# Altium PCB MachPCB.PcbDoc
Units mm, origin at the board's own origin, x right, y up, seen from the top; angles counter-clockwise.
Board outline 94.23 x 98.55 mm, 2 copper layers (Top Layer, Bottom Layer); 37 components, 27 nets, 126 pads, 2 vias.
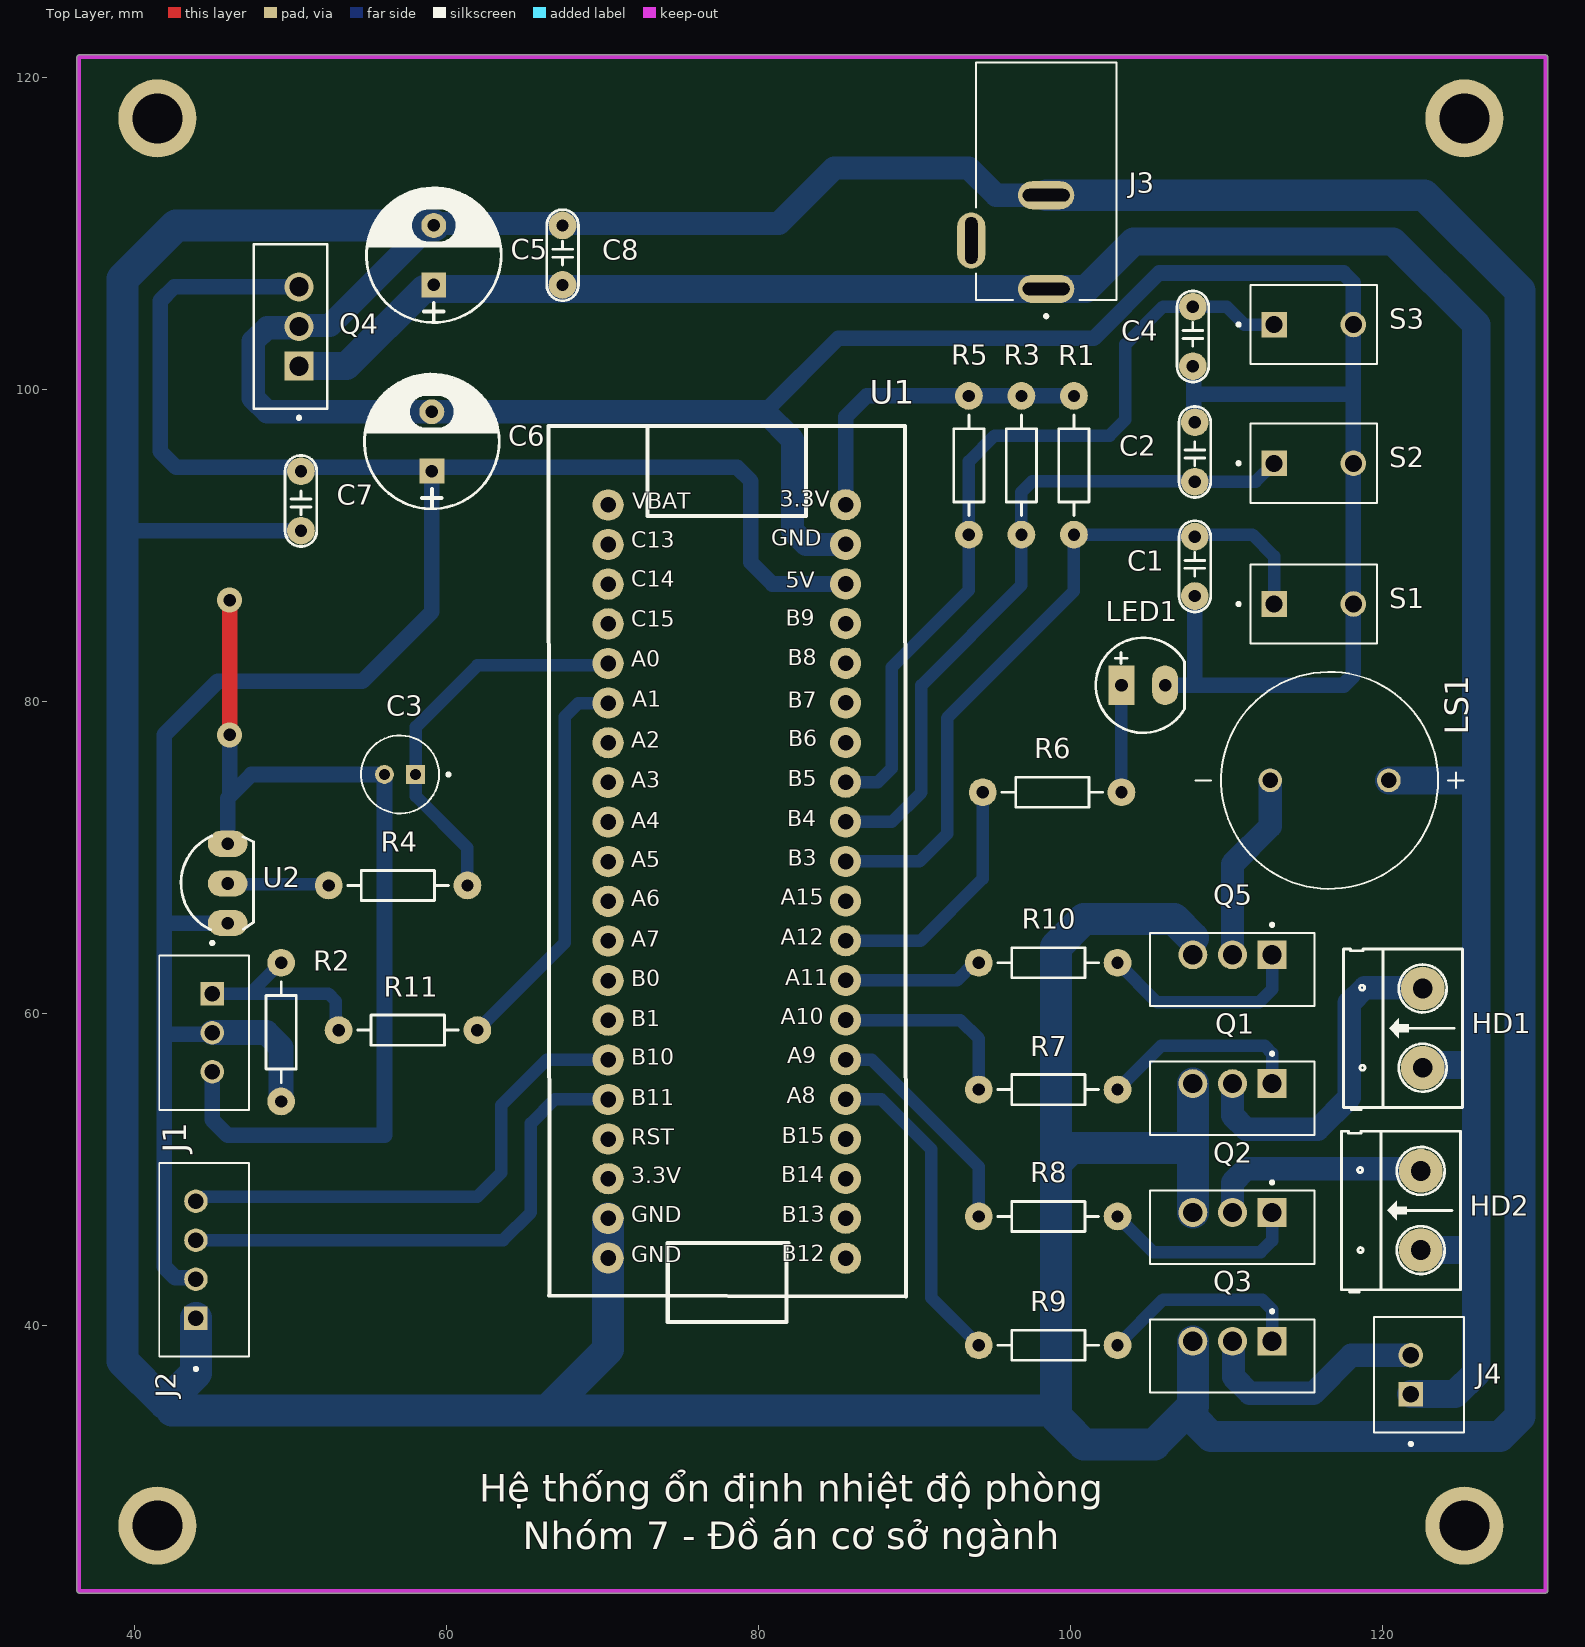
[diagram p0: Top Layer view]
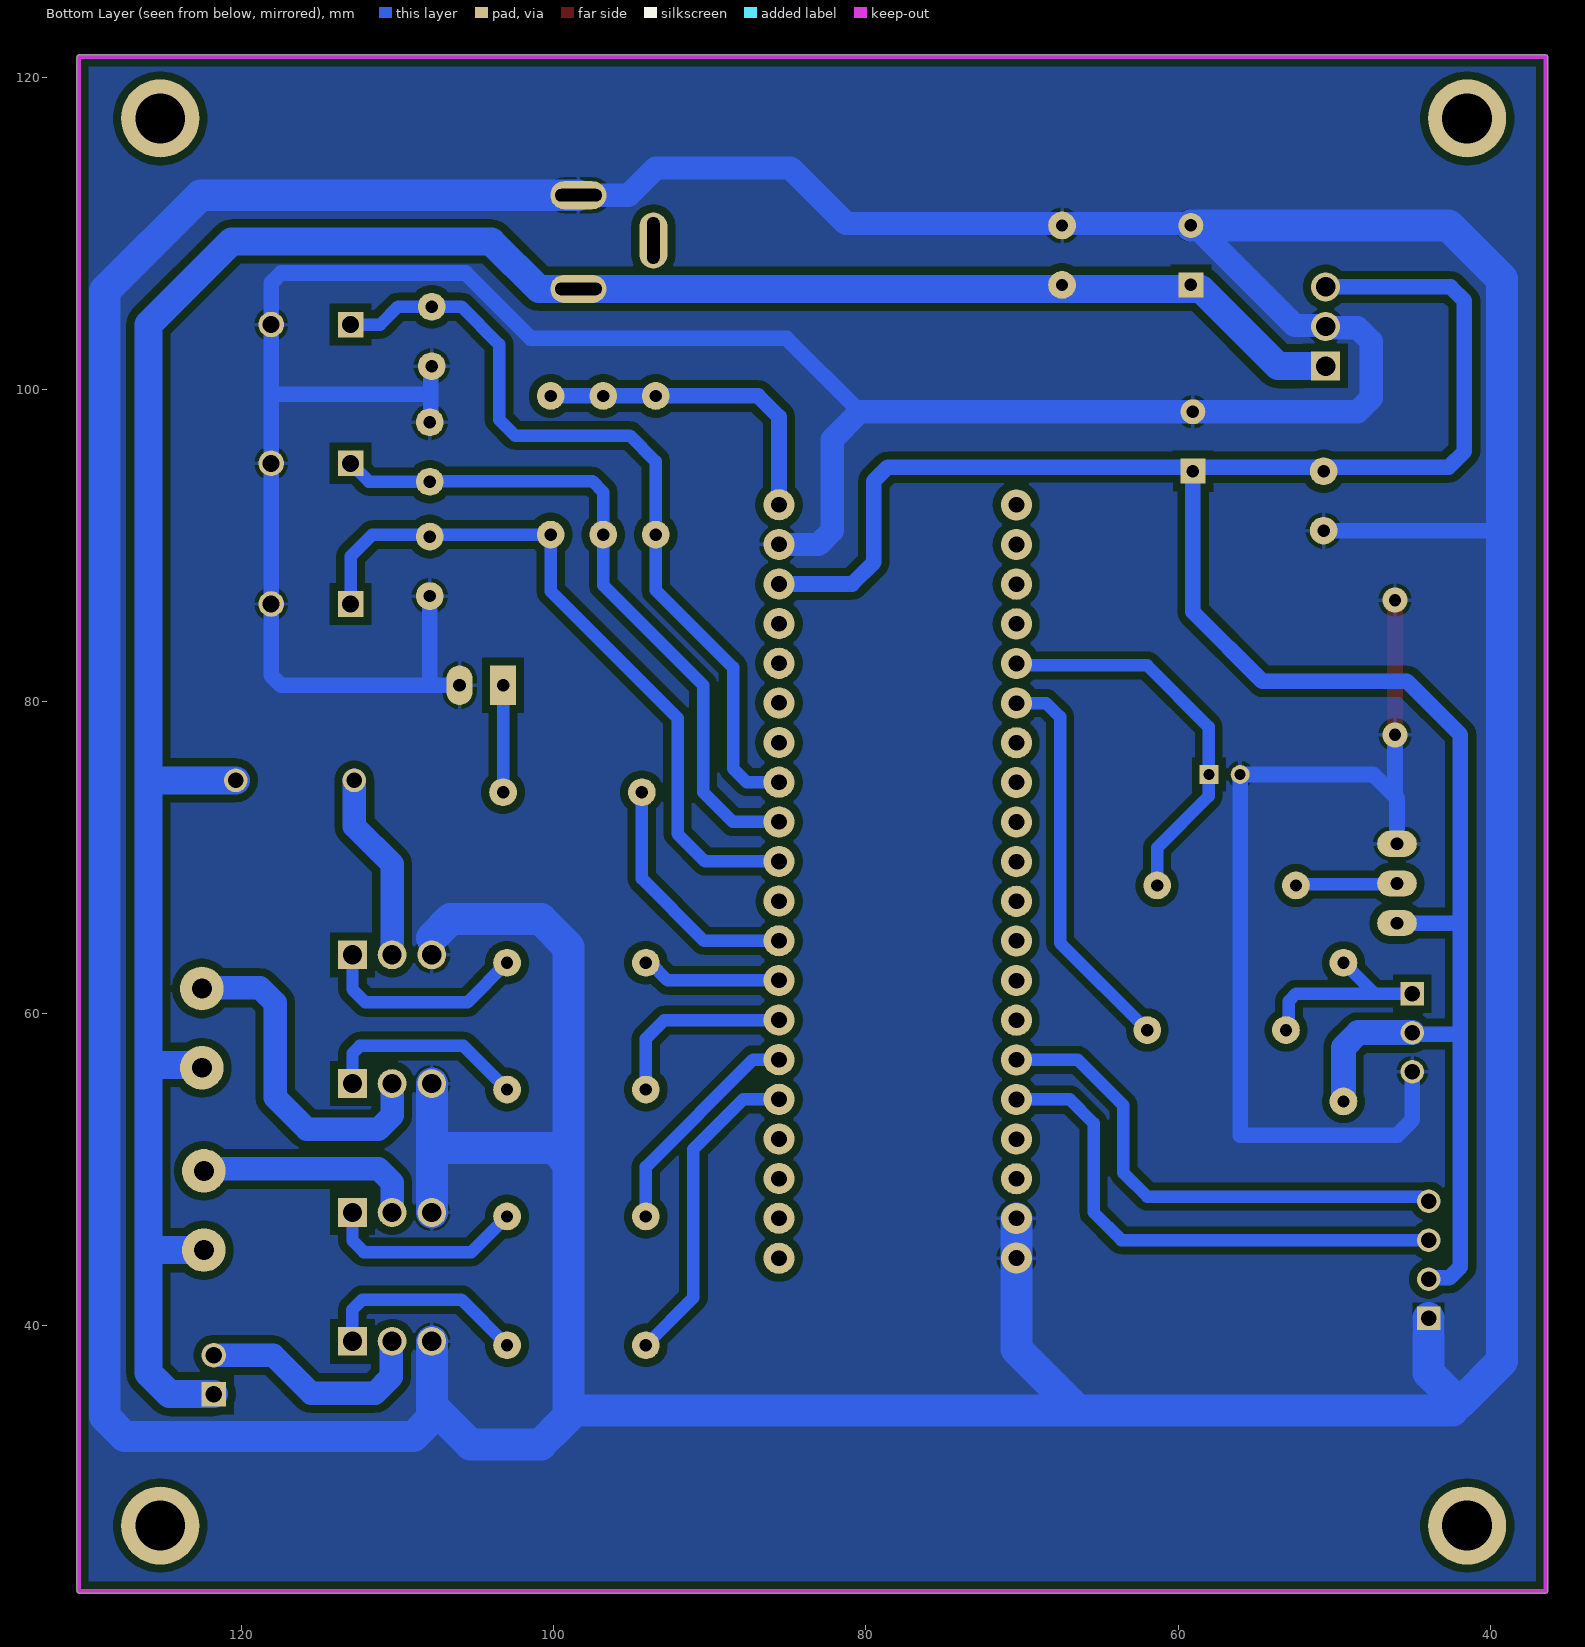
[diagram p1: Bottom Layer view, seen from below]
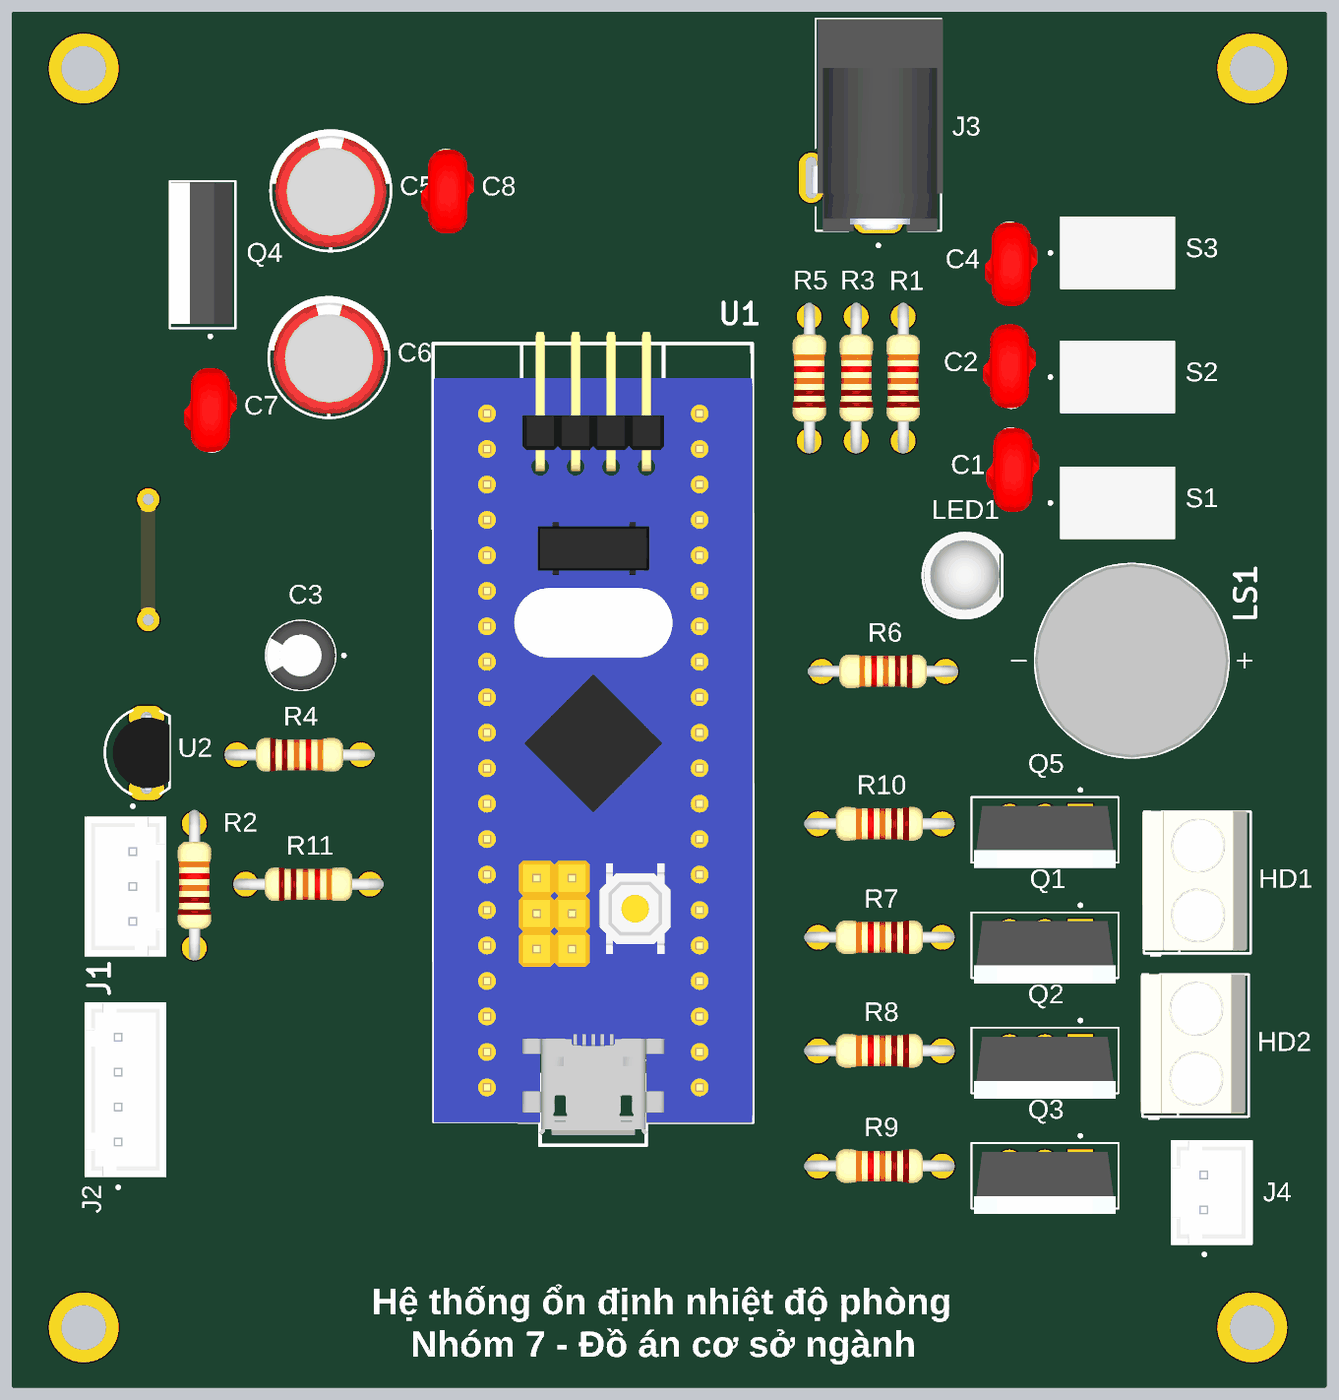
[diagram p2: 3D render of the assembled board from above, using the file's embedded part models]

## Layer stack, top to bottom
Top Solder: solder mask 0.0102, Solder Resist, Dk 3.5
Top Layer: signal copper 0.0356
Dielectric 1: dielectric 0.32, FR-4, Dk 4.8
Bottom Layer: signal copper 0.0356
Bottom Solder: solder mask 0.0102, Solder Resist, Dk 3.5

## Board outline
36.322,22.987 36.322,121.285 cw(c36.449,121.285) 36.449,121.412 130.429,121.412 cw(c130.429,121.285) 130.556,121.285 130.556,22.987 cw(c130.429,22.987) 130.429,22.86 36.449,22.86 cw(c36.449,22.987)

## Design rules (kind name [scope] priority, off if disabled: settings)
Clearance Polygon [InPolygon] p1: gap=0.5 ignorepadtopadclearanceinfootprint=FALSE
Clearance [All] p2: gap=0.37 ignorepadtopadclearanceinfootprint=FALSE
PolygonConnect [All] p1: connectstyle=Relief reliefconductorwidth=0.254 reliefentries=4 polygonreliefangle="90 Angle" airgapwidth=0.254
RoutingVias [All] p1: holewidth=0.711 width=1.27 viastyle="Through Hole" minholewidth=0.711 minwidth=1.27 maxholewidth=0.711 maxwidth=1.27
SolderMaskExpansion [All] p1: expansion=0.102 istentingtop=FALSE
Width POWER [(InNet('12V') OR InNet('NetHD1_2') OR InNet('NetHD2_2') OR InNet('NetLS1_N') OR InNet('NetJ4_2') OR InNet('GND') OR InNet('5V')OR InNet('3.3V'))] p1: maxlimit=3 minlimit=1 preferedwidth=1.8
Width NET [All] p2: maxlimit=0.8 minlimit=0.8 preferedwidth=0.8
30 further rules are at their usual default settings.

## Components (designator, comment, footprint, x,y, rotation, side; value= is the part's Value field where it differs from the comment)
C1 "104" CN1.5 107.95,90.551 r270 top value=100pF
C2 "104" CN1.5 107.95,94.069 r90 top value=100pF
C3 "0.1uF" CAPPRD200W50D550H1250 57.023,75.311 r180 top
C4 "104" CN1.5 107.823,105.283 r270 top value=100pF
C5 "200uF" CP1.5/3.4 59.182,106.68 r90 top
C6 "200uF" CP1.5/3.4 59.055,94.742 r90 top
C7 "104" CN1.5 50.673,90.932 r90 top value=100pF
C8 "104" CN1.5 67.437,110.49 r270 top value=100pF
HD1 "Header 2" HED2 122.555,56.515 r90 top
HD2 "Header 2" HED2 122.428,44.831 r90 top
J1 "Header XH2.54 3P" JST_B3B-XH-A 44.467,58.761 r90 top
J2 "Header XH2.54 4P" JST_B4B-XH-A 44.467,44.216 r270 top
J3 "DJ_2.5x5.7mm" CUI_PJ-059B 98.425,106.426 r270 top
J4 "Header XH2.54 2P" JST_B2B-XH-A 122.318,36.85 r270 top
LED1 "LED" LED-5R 104.648,81.026 r0 top value="LED 3 ly Single Colour"
LS1 "Buzzer" Buzzer-5V 116.586,74.93 r180 top
Q1 "IRLZ44N" TO254P1054X469X1930-3 110.363,54.559 r180 top
Q2 "IRLZ44N" TO254P1054X469X1930-3 110.363,46.304 r180 top
Q3 "IRLZ44N" TO254P1054X469X1930-3 110.363,38.049 r180 top
Q4 "LM7805T" TO254P1054X470X2600-3 50.546,101.473 r90 top
Q5 "IRLZ44N" TO254P1054X469X1930-3 110.363,62.814 r180 top
R1 "10k" R1/4W 100.203,99.568 r270 top value="R1/4W - 1K"
R2 "1k" R1/4W 49.403,63.246 r270 top value="R1/4W - 1K"
R3 "10k" R1/4W 96.837,99.568 r270 top value="R1/4W - 1K"
R4 "1k" R1/4W 61.341,68.199 r180 top value="R1/4W - 1K"
R5 "10k" R1/4W 93.472,99.568 r270 top value="R1/4W - 1K"
R6 "1k" R1/4W 94.361,74.168 r0 top value="R1/4W - 1K"
R7 "220" R1/4W 94.107,55.118 r0 top value="R1/4W - 1K"
R8 "220" R1/4W 94.107,46.99 r0 top value="R1/4W - 1K"
R9 "220" R1/4W 94.107,38.735 r0 top value="R1/4W - 1K"
R10 "220" R1/4W 94.107,63.246 r0 top value="R1/4W - 1K"
R11 "0" R1/4W 61.976,58.928 r180 top value="R1/4W - 1K"
S1 "PushButton" SW_800AWSP9M2QE 115.57,86.233 r0 top
S2 "PushButton" SW_800AWSP9M2QE 115.57,95.25 r0 top
S3 "PushButton" SW_800AWSP9M2QE 115.57,104.14 r0 top
U1 "STM32F103C8T6" "Stm32 BluePill" 77.744,74.217 r0 top
U2 "LM35" QTO-92 45.974,68.326 r90 top

## Footprints (in the part's own frame and the unit in brackets; to place one, negate y for a bottom-side part, rotate by r counter-clockwise, add the part's x,y. Pads: shape width x height; smd on the part's side, far side on the other; paste and mask are expansions set on the pad)
Buzzer-5V [mm]
  round 1.508 hole 1: N(3.8,0) P(-3.8,0)
  silkscreen extent -8.59,-6.95 8.59,6.95, body extent -6.95,-6.94 6.95,6.94, height 7.5
CAPPRD200W50D550H1250 [mm]
  rect 1.208x1.208 / inner round 1.208 / far side rect 1.208x1.208 hole 0.7: 1(-1,0)
  round 1.208 hole 0.7: 2(1,0)
  silkscreen extent -3.2,-2.5 2.5,2.5, body extent -2.5,-2.5 2.5,2.5, height 12.5
CN1.5 [mil]
  round 70 hole 31: 1(0,0) 2(150,0)
  silkscreen extent -40,-40 190,40, body extent -41,-70 195,80, height 989
CP1.5/3.4 [mm] "Tu hoa 220->470uF,16V, 470uF/16V,25V"
  rect 1.6x1.6 hole 0.8: 1(0,0)
  round 1.6 hole 0.8: 2(3.81,0)
  silkscreen extent -2.41,-4.32 6.22,4.32, body extent -2.16,-4 5.84,4, height 11.33
CUI_PJ-059B [mm]
  oval 1.8x3.6 hole 0.8 slot 3 at 90 deg: 1(0,0) 2(-6,0)
  oval 3.6x1.8 hole 0.8 slot 3 at 0 deg: 3(-3.1,-4.8)
  silkscreen extent -14.5,-4.5 1.85,4.5, body extent -14.46,-4.77 0.74,4.63, height 11
HED2 [mil] "Header 2, 2 pin, hight 300mil, Pin to Pin 200, Colour Green"
  round 110 hole 50: 1(0,0) 2(200,0)
  silkscreen extent -106,-100 300,200, body extent -92,-90 302,205, height 394
JST_B2B-XH-A [mm]
  rect 1.575x1.575 / inner round 1.575 / far side rect 1.575x1.575 hole 1.05: 1(1.25,-0.525)
  round 1.575 hole 1.05: 2(-1.25,-0.525)
  silkscreen extent -3.7,-2.88 4.54,2.88, body extent -3.7,-2.92 3.7,2.83, height 7
JST_B3B-XH-A [mm]
  rect 1.508x1.508 / inner round 1.508 / far side rect 1.508x1.508 hole 1: 1(2.5,-0.525)
  round 1.508 hole 1: 2(0,-0.525) 3(-2.5,-0.525)
  silkscreen extent -4.95,-2.88 5.85,2.88, body extent -4.95,-2.88 4.95,2.88, height 7
JST_B4B-XH-A [mm]
  rect 1.508x1.508 / inner round 1.508 / far side rect 1.508x1.508 hole 1: 1(3.75,-0.525)
  round 1.508 hole 1: 2(1.25,-0.525) 3(-1.25,-0.525) 4(-3.75,-0.525)
  silkscreen extent -6.2,-2.88 7.1,2.88, body extent -6.2,-2.88 6.2,2.88, height 7
LED-5R [mil] "LED 2 PIN, 5 ly , Only Red colour, pin to pin 110mil"
  rect 65x100 hole 32: 1(-55,0)
  oval 65x100 hole 32: 2(55,0)
  silkscreen extent -120,-120 104,120, body extent -116,-117 98,120, height 485
QTO-92 [mil] "TO-92"
  oval 66x100 hole 32: 1(-100,0) 2(0,0) 3(100,0)
  silkscreen extent -117,-65 120,118, body extent -109,-66 109,95, height 385
R1/4W [mil] "R 1/4W, 2 Pin, 350mil"
  round 70 hole 31: 1(0,0) 2(350,0)
  silkscreen extent 48,-38 302,38, body extent -40,-47 386,47, height 111
"Stm32 BluePill" [mm]
  round 2 hole 1: 1(7.828,-29.909) 2(7.828,-27.343) 3(7.828,-24.803) 4(7.828,-22.263) 5(7.828,-19.723) 6(7.828,-17.183) 7(7.828,-14.643) 8(7.828,-12.103) 9(7.828,-9.563) 10(7.828,-7.023) 11(7.828,-4.483) 12(7.828,-1.943) 13(7.828,0.597) 14(7.828,3.137) 15(7.828,5.677) 16(7.828,8.217) 17(7.828,10.757) 18(7.828,13.297) 19(7.828,15.837) 20(7.828,18.377) 21(-7.386,18.366) 22(-7.386,15.826) 23(-7.386,13.286) 24(-7.386,10.746) 25(-7.386,8.206) 26(-7.386,5.666) 27(-7.386,3.126) 28(-7.386,0.586) 29(-7.386,-1.954) 30(-7.386,-4.494) 31(-7.386,-7.034) 32(-7.386,-9.574) 33(-7.386,-12.114) 34(-7.386,-14.654) 35(-7.386,-17.194) 36(-7.386,-19.734) 37(-7.386,-22.274) 38(-7.386,-24.814) 39(-7.386,-27.354) 40(-7.386,-29.894)
  silkscreen extent -11.22,-34 11.69,23.43, body extent -11.18,-33.27 11.68,24.29, height 12.31
SW_800AWSP9M2QE [mm]
  rect 1.635x1.635 / inner round 1.635 / far side rect 1.635x1.635 hole 1.09 mask+0.102: 1(-2.54,0)
  round 1.635 hole 1.09 mask+0.102: 3(2.54,0)
  silkscreen extent -4.91,-2.54 4.07,2.54, body extent -4.07,-2.54 4.07,2.54, height 18.85
TO254P1054X469X1930-3 [mm]
  rect 1.85x1.85 / inner round 1.85 / far side rect 1.85x1.85 hole 1.23: 1(-2.54,-0.94)
  round 1.85 hole 1.23: 2(0,-0.94) 3(2.54,-0.94)
  silkscreen extent -5.27,-2.96 5.27,2.35, body extent -5.08,-1.71 5.08,2.73, height 15.01
TO254P1054X470X2600-3 [mm]
  rect 1.86x1.86 / inner round 1.86 / far side rect 1.86x1.86 hole 1.24: 1(0,0)
  round 1.86 hole 1.24: 2(2.54,0) 3(5.08,0)
  silkscreen extent -3.41,-1.8 7.81,2.9, body extent -2.41,-1.57 7.69,2.83, height 19.05

## Part data
C1 C2 C4 C7 C8: library part CN1, "Cap np  1pF - 472pF"
C3 C5 C6: library part "Tu Hoa 4.7uF", "Capacitor, Aluminum Electrolytic, Cap 4.7uF 25V 20%, Radial 5X11 LS 5 mm", Package="RADIAL-2 NICHICON", Check_prices=https://www.snapeda.com/parts/UVR1E4R7MDD/Nichicon/view-part/?ref=eda, MF=Nichicon, MP=UVR1E4R7MDD, SnapEDA_Link=https://www.snapeda.com/parts/UVR1E4R7MDD/Nichicon/view-part/?ref=snap
HD1 HD2: library part Hed2, "Header 2 (Green)"
J1: "Connector Header Through Hole 3 position 0.098 (2.54mm)", Package=None, Check_prices=https://www.snapeda.com/parts/B3B-XH-A/JST+Sales+America+Inc./view-part/?ref=eda, MF="JST Sales", MP=B3B-XH-A, SnapEDA_Link=https://www.snapeda.com/parts/B3B-XH-A/JST+Sales+America+Inc./view-part/?ref=snap
J2: "Connector Header Through Hole 4 position 0.098 (2.54mm)", Package=None, Check_prices=https://www.snapeda.com/parts/B4B-XH-A/JST/view-part/?ref=eda, MF="JST Sales", MP=B4B-XH-A, SnapEDA_Link=https://www.snapeda.com/parts/B4B-XH-A/JST/view-part/?ref=snap
J3 LS1: Package=None, Availability=Unavailable, Price=None
  J3: MF="{'manufacturer': u'CUI'}", MP=PJ-059B
  LS1: MP=KPEG242-5V
J4: "Connector Header Through Hole 2 position 0.098 (2.54mm)", Package=None, Availability=Unavailable, MF="{'manufacturer': u'JST Sales America Inc.'}", MP=B2B-XH-A, Price=None
LED1: "LED Single colour Green and Red"
Q1 Q2 Q3 Q5: "N-Channel 55 V 47A (Tc) 3.8W (Ta), 110W (Tc) Surface Mount D2PAK", Package="TO-220-3 Infineon / IR", Availability="Not in stock", Check_prices=https://www.snapeda.com/parts/IRLZ44N/Infineon/view-part/?ref=eda, MF="Infineon / IR", MP=IRLZ44N, Price=None, SnapEDA_Link=https://www.snapeda.com/parts/IRLZ44N/Infineon/view-part/?ref=snap
Q4: "IC Regulator 7805T/LM7805T COMSET RoHS TO220", Package="TO-220 Comset Semiconductors", Check_prices=https://www.snapeda.com/parts/LM7805CT/Comset+Semiconductors/view-part/?ref=eda, MF="Comset Semiconductors", MP=LM7805CT, SnapEDA_Link=https://www.snapeda.com/parts/LM7805CT/Comset+Semiconductors/view-part/?ref=snap
R1 R2 R3 R4 R5 R6 R7 R8 R9 R10 R11: library part R1/4W, "Resistor 1/4W"
S1 S2 S3: "Pushbutton Switch,800A Series,SPST,OFF-(ON),Black,Through Hole,1A,250VAC,PC", Package=None, Check_prices=https://www.snapeda.com/parts/800AWSP9M2QE/E-Switch/view-part/?ref=eda, MF=E-Switch, MP=800AWSP9M2QE, SnapEDA_Link=https://www.snapeda.com/parts/800AWSP9M2QE/E-Switch/view-part/?ref=snap
U1: library part "STM32F103C8T6 BluePill", "Designed By @Alixahedi"
U2: "Teminal"

## Free pads (board coordinates)
  round 5 hole 3.2: 2(41.475,27.178) 2(41.475,117.348) 2(125.222,27.178) 2(125.222,117.348)

## Via types
v1: diameter 1.6, hole 0.8, Top Layer to Bottom Layer, 2 vias

## Nets (pads, with @x,y where several pads share a name; then routed paths per layer and width w, separated by ;. In a path a pad name is that pad's centre, name@x,y a point inside that pad or via, vN(x,y) a via of type N, cw(c..) or ccw(c..) an arc to the next point about the centre after c; other vN are vias at no path point)
3.3V: R1.1 R3.1 R5.1 U1.20 | length 20.8
  Bottom Layer w1: U1.20 85.573,98.222 86.919,99.568 R5.1 R3.1 R1.1
5V: C6.1 C7.2 J1.2 J2.2 Q4.3 R2.2 U1.18 U2.1 | length 150.8
  Bottom Layer w1: J2.2 43.845,43.063 42.613,43.063 41.91,43.766 41.91,58.674 ; J1.2 44.905,58.674 41.91,58.674 ; U2.1 42.037,65.786 41.91,65.913 ; Q4.3 42.545,106.553 41.656,105.664 41.656,96.012 42.672,94.996 78.613,94.996 79.502,94.107 79.502,88.9 80.888,87.514 U1.18 ; C6.1 59.055,85.725 54.61,81.28 45.339,81.28 41.91,77.851 41.91,65.913 ; 41.91,58.674 41.91,65.913
  Bottom Layer w1.6: J1.2 48.466,58.761 49.403,57.824 R2.2
12V: C5.1 C8.2 HD1.1 HD2.1 J3.1 J4.1 LS1.P Q4.1 | length 165.7
  Bottom Layer w1.8: Q4.1 53.594,101.473 58.547,106.426 J3.1 100.965,106.426 104.013,109.474 120.65,109.474 125.984,104.14 125.984,74.93 ; LS1.P 125.984,74.93 ; J4.1 124.627,35.6 125.984,36.957 125.984,44.831 ; HD2.1 125.984,44.831 ; HD1.1 122.745,56.705 125.666,56.705 125.984,57.023 ; 125.984,44.831 125.984,57.023 ; 125.984,57.023 125.984,74.93
Button1: C1.1 R1.2 S1.1 U1.11 | length 46.2
  Bottom Layer w0.8: U1.11 90.308,69.734 92.075,71.501 92.075,78.924 100.203,87.052 R1.2 111.633,90.678 113.03,89.281 S1.1
Button2: C2.1 R3.2 S2.1 U1.12 | length 44.5
  Bottom Layer w0.8: U1.12 88.53,72.274 90.424,74.168 90.424,81.026 96.837,87.439 R3.2 96.837,93.408 97.536,94.107 C2.1@107.95,94.107 ; C2.1 111.849,94.069 S2.1
Button3: C4.1 R5.2 S3.1 U1.13 | length 52
  Bottom Layer w0.8: U1.13 87.641,74.814 88.519,75.692 88.519,82.169 93.472,87.122 R5.2 93.472,95.377 95.123,97.028 102.489,97.028 103.505,98.044 103.505,102.87 105.918,105.283 C4.1 109.982,105.283 111.125,104.14 S3.1
Buzzer: R10.1 U1.8 | length 9
  Bottom Layer w0.8: U1.8 92.71,62.114 93.842,63.246 R10.1
DHT11: R11.1 U1.26 | length 25.5
  Bottom Layer w0.8: R11.1 67.564,64.516 67.564,78.994 68.453,79.883 U1.26
FAN: R9.1 U1.5 | length 20.6
  Bottom Layer w0.8: U1.5 87.873,54.494 91.059,51.308 91.059,41.783 R9.1
GND: C1.2 C2.2 C3.2 C4.2 C5.2 C6.2 C7.1 C8.1 J1.3 J2.1 J3.2 LED1.2 Q1.3 Q2.3 Q3.3 Q4.2 Q5.3 S1.3 S2.3 S3.3 U1.19 U1.39 U1.40 U2.3 | length 650
  Top Layer w1: v1(46.101,77.851) v1(46.101,86.487)
  Bottom Layer w1: 39.243,90.805 39.37,90.932 C7.1 ; J1.3 44.992,53.179 45.974,52.197 56.023,52.197 C3.2 47.498,75.311 45.974,73.787 U2.3 ; 46.101,74.168 v1(46.101,77.851) ; 80.391,98.552 85.09,103.251 101.473,103.251 105.664,107.442 117.475,107.442 118.11,106.807 S3.3 118.11,99.695 ; LED1.2 108.204,81.026 ; C4.2 107.886,101.409 107.886,99.676 ; C1.2 107.95,81.28 108.204,81.026 ; C2.2 107.886,97.942 107.886,99.676 ; 107.886,99.676 118.091,99.676 118.11,99.695 ; 108.204,81.026 117.475,81.026 118.11,81.661 S1.3 S2.3 118.11,99.695
  Bottom Layer w1.5: C5.2@58.928,110.49 52.52,104.082 50.615,104.082 50.477,103.944 48.504,103.944 47.625,103.065 47.625,99.431 48.504,98.552 C6.2 80.391,98.552 82.169,96.774 82.169,90.922 83.048,90.043 85.562,90.043 U1.19 ; C5.2@59.182,110.617 81.28,110.617 84.836,114.173 93.472,114.173 95.219,112.426 J3.2
  Bottom Layer w2: J3.2 122.651,112.426 128.778,106.299 128.778,34.163 127.508,32.893 108.995,32.893 107.823,34.065 107.823,34.856
  Bottom Layer w2.05: 42.418,34.544 66.421,34.544 ; J2.1 43.942,36.957 41.974,34.989 39.243,37.719 39.243,90.805 39.243,107.061 42.672,110.49 58.928,110.49 C5.2 ; U1.39 U1.40 70.358,38.481 66.421,34.544 ; 99.06,34.544 66.421,34.544 ; Q3.3 107.823,34.856 105.352,32.385 100.838,32.385 99.568,33.655 99.06,34.163 99.06,50.419 ; Q2.3 107.823,51.371 ; Q1.3 107.823,51.371 ; 107.823,64.839 106.622,66.04 100.838,66.04 99.06,64.262 99.06,51.371 99.06,50.419 ; 99.06,50.419 100.013,51.371 107.823,51.371
LED: R6.1 U1.9 | length 16
  Bottom Layer w0.8: U1.9 90.372,64.654 94.361,68.643 R6.1
LEDHALO1: R7.1 U1.7 | length 12.3
  Bottom Layer w0.8: U1.7 92.913,59.574 94.107,58.38 R7.1
LEDHALO2: R8.1 U1.6 | length 14.6
  Bottom Layer w0.8: U1.6 87.238,57.034 94.107,50.165 R8.1
LM35: C3.1 R4.1 U1.25 | length 25.5
  Bottom Layer w0.8: R4.1 61.341,70.612 58.039,73.914 58.039,78.359 61.976,82.296 70.231,82.296 U1.25
NetHD1_2: HD1.2 Q1.2 | length 21.9
  Bottom Layer w1.5: Q1.2 110.363,53.457 111.242,52.578 115.824,52.578 117.856,54.61 117.856,60.67 118.831,61.646 122.504,61.646 HD1.2
NetHD2_2: HD2.2 Q2.2 | length 14.4
  Bottom Layer w1.5: Q2.2 110.363,49.159 111.242,50.038 122.301,50.038 HD2.2
NetJ1_1: J1.1 R2.1 R11.2 | length 12.9
  Bottom Layer w0.8: J1.1 47.418,61.261 ; R2.1 47.418,61.261 ; R11.2 52.902,59.112 52.902,60.792 52.433,61.261 47.418,61.261
NetJ4_2: J4.2 Q3.2 | length 15.1
  Bottom Layer w1.5: Q3.2 110.43,38.922 110.43,36.7 111.463,35.667 115.55,35.667 117.983,38.1 J4.2
NetLED1_1: LED1.1 R6.2 | length 6.9
  Bottom Layer w0.8: R6.2 LED1.1
NetLS1_N: LS1.N Q5.2 | length 12.2
  Bottom Layer w1.5: Q5.2 110.363,69.567 112.784,71.988 112.784,74.928 LS1.N
NetQ1_1: Q1.1 R7.2 | length 13.2
  Bottom Layer w0.8: R7.2 105.791,57.912 112.434,57.912 112.903,57.443 Q1.1
NetQ2_1: Q2.1 R8.2 | length 13
  Bottom Layer w0.8: R8.2 105.283,44.704 112.171,44.704 112.903,45.436 Q2.1
NetQ3_1: Q3.1 R9.2 | length 13.4
  Bottom Layer w0.8: R9.2 105.918,41.656 112.268,41.656 112.92,41.004 112.92,39.006 Q3.1
NetQ5_1: Q5.1 R10.2 | length 13.5
  Bottom Layer w0.8: R10.2 105.537,60.706 112.072,60.706 112.903,61.537 Q5.1
NetR4_2: R4.2 U2.2 | length 6.5
  Bottom Layer w0.8: U2.2 46.038,68.263 52.387,68.263 R4.2
SCL: J2.4 U1.35 | length 32.7
  Bottom Layer w0.8: J2.4 44.134,47.966 44.428,48.26 61.976,48.26 63.5,49.784 63.5,54.102 66.421,57.023 U1.35
SDA: J2.3 U1.36 | length 33.5
  Bottom Layer w0.8: J2.3 63.627,45.466 65.405,47.244 65.405,52.959 66.929,54.483 U1.36
pads on no net: J3.3 U1.1 U1.2 U1.3 U1.4 U1.10 U1.14 U1.15 U1.16 U1.17 U1.21 U1.22 U1.23 U1.24 U1.27 U1.28 U1.29 U1.30 U1.31 U1.32 U1.33 U1.34 U1.37 U1.38

## Polygon pours and split planes (outlines as drawn)
GND on Bottom Layer "GND_L02_P001" (solid, pour order 1): 130.302,23.114 36.576,23.114 36.576,121.158 130.302,121.158

## Keep-outs
Keep-Out Layer:
  lines w0.254: 36.449,22.987 130.429,22.987 130.429,121.285 36.449,121.285 36.449,22.987

## Silkscreen, mask and mechanical layers (free items; w line width, h text height)
Top Overlay:
  text "Hệ thống ổn định nhiệt độ phòng" at 62.103,28.125 h3
  text "Nhóm 7 - Đồ án cơ sở ngành" at 64.897,25.077 h3

## Text inside footprints (layer, text, board x,y; h text height)
U1: Top Overlay "5V" at 81.737,86.911 h1.78; Top Overlay "B9" at 81.737,84.498 h1.78; Top Overlay "B8" at 81.864,81.958 h1.78; Top Overlay "3.3V" at 81.356,92.118 h1.78; Top Overlay "GND" at 80.792,89.604 h1.78; Top Overlay "A5" at 71.831,69.004 h1.78; Top Overlay "A2" at 71.831,76.655 h1.78; Top Overlay "A3" at 71.831,74.11 h1.78; Top Overlay "A4" at 71.831,71.525 h1.78; Top Overlay "RST" at 71.831,51.224 h1.78; Top Overlay "B10" at 71.831,56.355 h1.78; Top Overlay "B11" at 71.831,53.77 h1.78; Top Overlay "A6" at 71.831,66.515 h1.78; Top Overlay "A7" at 71.831,63.93 h1.78; Top Overlay "B0" at 71.831,61.384 h1.78; Top Overlay "B1" at 71.831,58.825 h1.78; Top Overlay "3.3V" at 71.831,48.761 h1.78; Top Overlay "B15" at 81.493,51.326 h1.78; Top Overlay "A8" at 81.801,53.891 h1.78; Top Overlay "A11" at 81.717,61.466 h1.78; Top Overlay "B3" at 81.864,69.106 h1.78; Top Overlay "A9" at 81.831,56.457 h1.78; Top Overlay "A15" at 81.43,66.617 h1.78; Top Overlay "A12" at 81.43,64.032 h1.78; Top Overlay "A10" at 81.43,58.946 h1.78; Top Overlay "VBAT" at 71.904,91.997 h1.78; Top Overlay "B5" at 81.864,74.211 h1.78; Top Overlay "B14" at 81.463,48.842 h1.78; Top Overlay "B7" at 81.864,79.246 h1.78; Top Overlay "B4" at 81.831,71.626 h1.78; Top Overlay "B6" at 81.895,76.777 h1.78; Top Overlay "C15" at 71.831,84.422 h1.78; Top Overlay "C13" at 71.831,89.477 h1.78; Top Overlay "C14" at 71.831,86.988 h1.78; Top Overlay "A0" at 71.831,81.857 h1.78; Top Overlay "A1" at 71.902,79.297 h1.78; Top Overlay "GND" at 71.831,46.271 h1.78; Top Overlay "B13" at 81.483,46.271 h1.78; Top Overlay "GND" at 71.831,43.706 h1.78; Top Overlay "B12" at 81.493,43.762 h1.78